# Altium PCB PCB_Pedal.pcbdoc
Units mil, origin at the board's own origin, x right, y up, seen from the top; angles counter-clockwise.
Board outline 4088 x 3698 mil, 2 copper layers (Top Layer, Bottom Layer); 43 components, 64 nets, 165 pads, 41 vias.
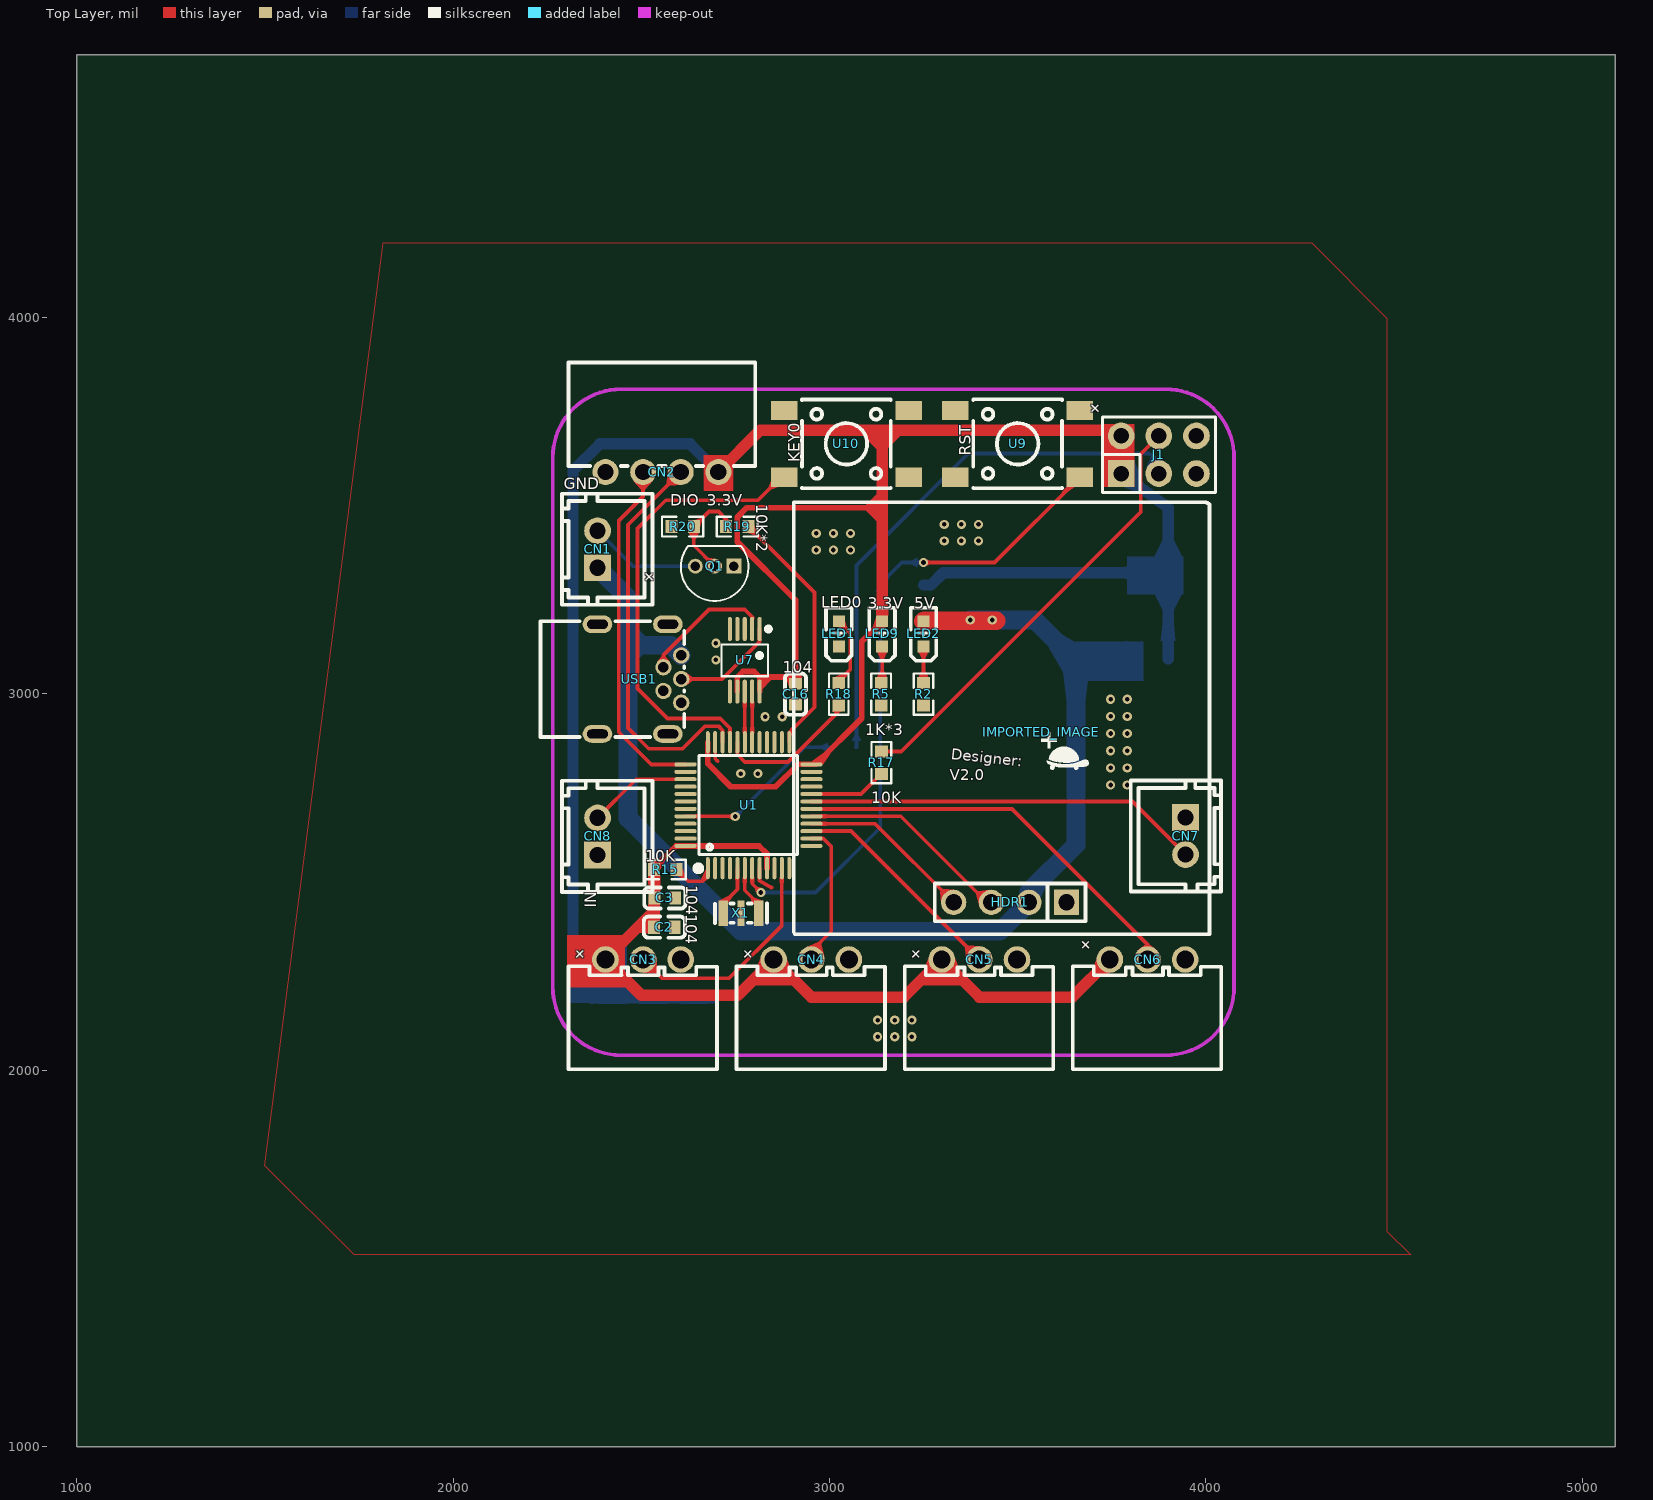
[diagram p0: Top Layer view]
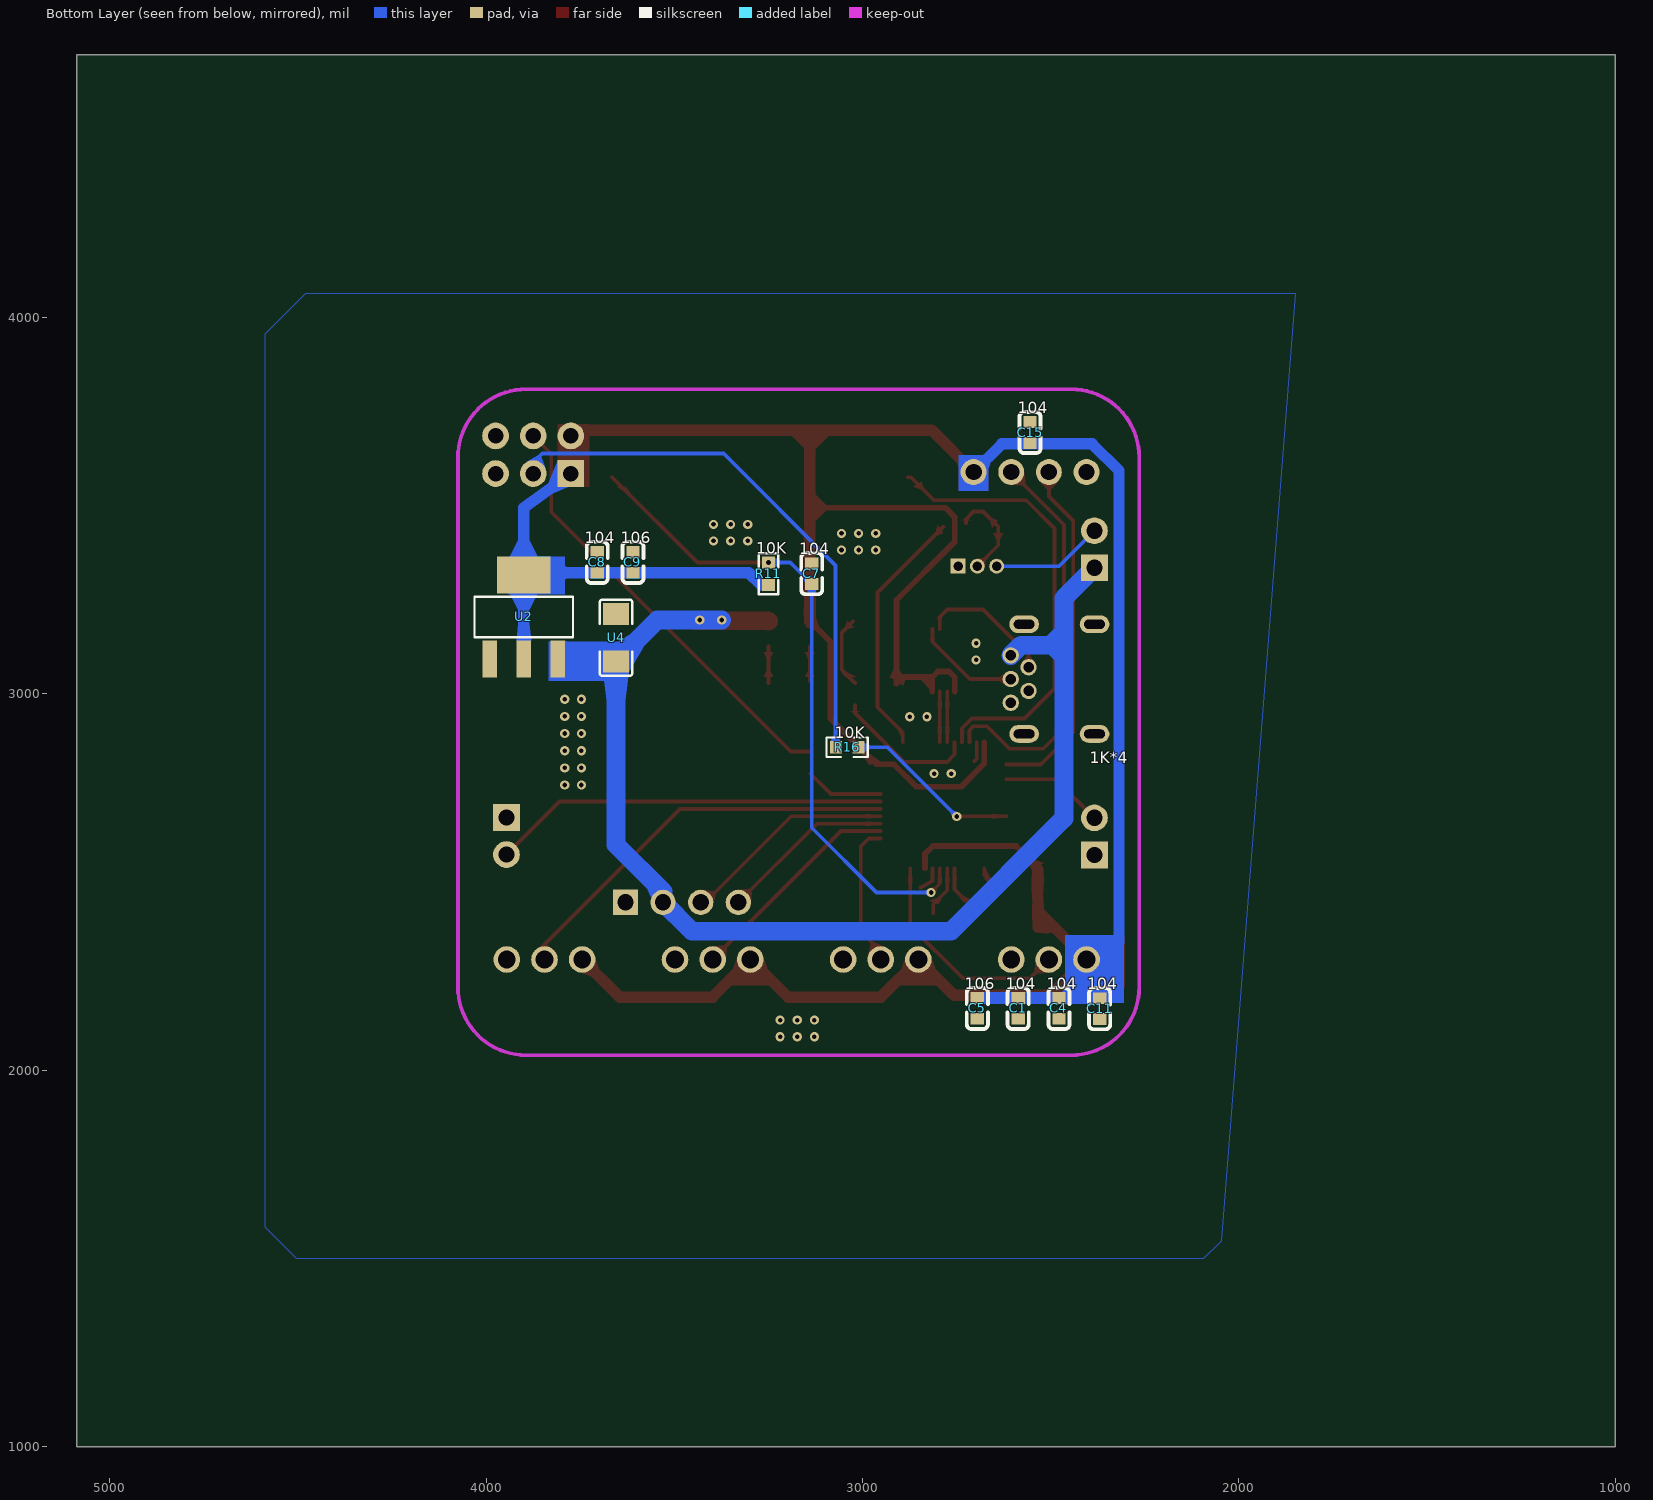
[diagram p1: Bottom Layer view, seen from below]

## Layer stack, top to bottom
Top Layer: signal copper (thickness not stored)
Dielectric: dielectric 12.6, FR-4, Dk 4.8
Bottom Layer: signal copper (thickness not stored)

## Board outline
5088,1000 1000,1000 1000,4698 5088,4698

## Components (designator, comment, footprint, x,y, rotation, side; value= is the part's Value field where it differs from the comment)
C1 "104" C0603#1 2586.7,2164 r270 bottom
C2 "104" C0603#2 2561.6,2380 r180 top
C3 "104" C0603#2 2562.9,2457.6 r180 top
C4 "104" C0603#1 2478.3,2164 r270 bottom
C5 "106" C0603#1 2695,2164 r270 bottom
C7 "104" C0603#1 3135,3319 r270 bottom
C8 "104" C0603#1 3705,3349 r90 bottom
C9 "106" C0603#1 3610,3349 r90 bottom
C11 "104" C0603#1 2370.2,2163.4 r90 bottom
C15 "104" C0603#1 2555,3694 r270 bottom
C16 "104" C0603#2 2910,2999 r90 top
CN1 "ZX-XH2.54-2PZZ" CONN-TH_2P-P2.50_HX25003-2A 2384,3384 r90 top
CN2 "XH-4AW_C2908613" CONN-TH_XH-4AW 2555,3589 r180 top
CN3 "XH-3AW_C2908612" CONN-TH_3P-P2.54_HCTL_XH-3AW 2505,2294 r180 top
CN4 "XH-3AW_C2908612" CONN-TH_3P-P2.54_HCTL_XH-3AW 2951.67,2294 r180 top
CN5 "XH-3AW_C2908612" CONN-TH_3P-P2.54_HCTL_XH-3AW 3398.33,2294 r180 top
CN6 "XH-3AW_C2908612" CONN-TH_3P-P2.54_HCTL_XH-3AW 3845,2294 r180 top
CN7 "ZX-XH2.54-2PZZ" CONN-TH_2P-P2.50_HX25003-2A 3946,2622 r270 top
CN8 "ZX-XH2.54-2PZZ" CONN-TH_2P-P2.50_HX25003-2A 2384,2621 r90 top
HDR1 "OLED" HDR-TH_4P-P2.54-V-M 3480,2445.89 r180 top
IMPORTED_IMAGE "IMPORTED_IMAGE" IMPORTED_IMAGE 3563.13,2897.73 r0 top
J1 "Header-Male-2.54_2x3" HDR-TH_6P-P2.54-V-M-R2-C3-S2.54-1 3875,3635 r0 top
LED1 "LED0603-R" LED0603-R-RD 3025,3159 r90 top
LED2 "LED0603-R" LED0603-R-RD 3250,3159.03 r90 top
LED9 "LED0603-R" LED0603-R-RD 3140,3159 r90 top
Q1 "2N3904_C2874602" TO-92-3_L4.6-W3.6-P1.30-L_2N3904 2695,3339 r180 top
R2 "1k" R0603#1 3250,2999.03 r270 top
R5 "1k" R0603#1 3137.39,2999.03 r270 top
R11 "10k" R0603#2 3250,3319 r270 bottom
R15 "10k" R0603#1 2564,2533 r180 top
R16 "10k" R0603#2 3041,2858 r180 bottom
R17 "10k" R0603#1 3138,2817 r270 top
R18 "1k" R0603#1 3024.77,2999.03 r90 top
R19 "10k" R0603#1 2755,3444 r180 top
R20 "10k" R0603#1 2610,3444 r0 top
U1 "STM32F103C8T6" LQFP-48_L7.0-W7.0-P0.50-LS9.0-BL 2785,2704 r0 top
U2 "AMS1117-3.3V" SOT-223-4_L6.5-W3.5-P2.30-LS7.0-BR 3900,3204 r90 bottom
U4 "47UF/10V" C1206 3655,3149 r270 bottom
U7 "CH340E" MSOP-10_L3.0-W3.0-P0.50-LS5.0-BL 2775,3089 r180 top
U9 "TPS645-5NC60" SW-SMD_4P-L6.0-W6.0-P4.50-LS9.2 3500,3664 r0 top
U10 "TPS645-5NC60" SW-SMD_4P-L6.0-W6.0-P4.50-LS9.2 3045,3664 r180 top
USB1 "UX-150-ARG4" MICRO-USB-TH_UX-150-ARG4 2495,3039 r270 top
X1 "8MHz" OSC-SMD_3P-L3.2-W1.3-P1.2-L 2765,2417 r0 top

## Footprints (in the part's own frame and the unit in brackets; to place one, negate y for a bottom-side part, rotate by r counter-clockwise, add the part's x,y. Pads: shape width x height; smd on the part's side, far side on the other; paste and mask are expansions set on the pad)
C0603#1 [mm]
  rect 0.8x0.9 smd paste+0 mask+0.051: 1(0.7,0) 2(-0.7,0)
  silkscreen extent -1.39,-0.71 1.39,0.71
C0603#2 [mm]
  rect 0.8x0.9 smd paste+0 mask+0.051: 1(-0.7,0) 2(0.7,0)
  silkscreen extent -1.39,-0.71 1.39,0.71
C1206 [mm]
  rect 1.485x1.728 smd paste-100 mask+0.051: 1(1.593,0) 2(-1.593,0)
  silkscreen extent -2.56,-1.09 2.56,1.09
CONN-TH_2P-P2.50_HX25003-2A [mm]
  rect 1.8x1.8 hole 1.1 paste+0 mask+0.05: 1(-1.25,0)
  round 1.8 hole 1.1 paste+0 mask+0.05: 2(1.25,0)
  silkscreen extent -3.75,-3.7 3.75,2.41
CONN-TH_3P-P2.54_HCTL_XH-3AW [mm]
  round 1.8 hole 1.199 paste+0 mask+0.051: 1(-2.54,0) 2(0.001,0) 3(2.54,0)
  silkscreen extent -4.98,0.46 5.04,7.4
CONN-TH_XH-4AW [mm]
  round 1.75 hole 1.1 paste+0 mask+0.05: 1(-3.81,0) 2(-1.27,0) 3(1.27,0) 4(3.81,0)
  silkscreen extent -6.3,-7.4 6.3,-0.4
HDR-TH_4P-P2.54-V-M [mm]
  rect 1.7x1.7 hole 1.1 paste+0 mask+0.051: 1(-3.81,0)
  round 1.7 hole 1.1 paste+0 mask+0.051: 2(-1.27,0) 3(1.27,0) 4(3.81,0)
  silkscreen extent -5.08,-1.27 5.08,1.27
HDR-TH_6P-P2.54-V-M-R2-C3-S2.54-1 [mm]
  rect 1.8x1.8 hole 1.05 paste+0 mask+0.051: 1(-2.54,-1.27)
  round 1.8 hole 1.05 paste+0 mask+0.051: 2(-2.54,1.27) 3(0,-1.27) 4(0,1.27) 5(2.54,-1.27) 6(2.54,1.27)
  silkscreen extent -3.81,-2.54 3.81,2.54
IMPORTED_IMAGE [mil]
  silkscreen extent 0,-100 126,0
LED0603-R-RD [mm]
  rect 0.8x0.8 smd paste+0 mask+0.051: 1(0.851,0) 2(-0.851,0)
  silkscreen extent -1.82,-0.86 1.77,0.86
LQFP-48_L7.0-W7.0-P0.50-LS9.0-BL [mm]
  oval 0.27x1.5 smd paste+0 mask+0.05: 1(-2.75,-4.25) 2(-2.25,-4.25) 3(-1.75,-4.25) 4(-1.25,-4.25) 5(-0.75,-4.25) 6(-0.25,-4.25) 7(0.25,-4.25) 8(0.75,-4.25) 9(1.25,-4.25) 10(1.75,-4.25) 11(2.25,-4.25) 12(2.75,-4.25) 25(2.75,4.25) 26(2.25,4.25) 27(1.75,4.25) 28(1.25,4.25) 29(0.75,4.25) 30(0.25,4.25) 31(-0.25,4.25) 32(-0.75,4.25) 33(-1.25,4.25) 34(-1.75,4.25) 35(-2.25,4.25) 36(-2.75,4.25)
  oval 1.5x0.27 smd paste+0 mask+0.05: 13(4.25,-2.75) 14(4.25,-2.25) 15(4.25,-1.75) 16(4.25,-1.25) 17(4.25,-0.75) 18(4.25,-0.25) 19(4.25,0.25) 20(4.25,0.75) 21(4.25,1.25) 22(4.25,1.75) 23(4.25,2.25) 24(4.25,2.75) 37(-4.25,2.75) 38(-4.25,2.25) 39(-4.25,1.75) 40(-4.25,1.25) 41(-4.25,0.75) 42(-4.25,0.25) 43(-4.25,-0.25) 44(-4.25,-0.75) 45(-4.25,-1.25) 46(-4.25,-1.75) 47(-4.25,-2.25) 48(-4.25,-2.75)
  silkscreen extent -3.59,-4.46 3.3,3.34
MICRO-USB-TH_UX-150-ARG4 [mm]
  round 1.1 hole 0.7 paste+0 mask+0.051: 1(-1.6,2.825) 2(-0.8,1.625) 3(0,2.825) 4(0.8,1.625) 5(1.6,2.825)
  oval 1.2x2 hole 0.6 slot 1.4 at 90 deg paste+0 mask+0.051: 6(-3.7,1.925) 6(-3.7,-2.825) 6(3.7,1.925) 6(3.7,-2.825)
  silkscreen extent -3.9,-6.67 3.9,3.03
MSOP-10_L3.0-W3.0-P0.50-LS5.0-BL [mm]
  oval 0.28x1.62 smd paste+0 mask+0.051: 1(-1,-2.11) 2(-0.5,-2.11) 3(0,-2.11) 4(0.5,-2.11) 5(1,-2.11) 6(1,2.11) 7(0.5,2.11) 8(0,2.11) 9(-0.5,2.11) 10(-1,2.11)
  silkscreen extent -1.74,-2.26 1.58,1.07
OSC-SMD_3P-L3.2-W1.3-P1.2-L [mm]
  rect 0.65x1.7 smd paste+0 mask+0.051: 1(-1.2,0) 3(1.2,0)
  rect 0.5x1.7 smd paste+0 mask+0.051: 2(0,0)
  silkscreen extent -1.75,-0.66 1.75,0.66
R0603#1 [mil]
  rect 31.75x34.02 smd paste-3937.01 mask+2: 1(-29.66,0) 2(29.65,0)
  silkscreen extent -55,-26 55,26
R0603#2 [mil]
  rect 31.75x34.02 smd paste-3937.01 mask+2: 1(29.66,0) 2(-29.66,0)
  silkscreen extent -55,-26 55,26
SOT-223-4_L6.5-W3.5-P2.30-LS7.0-BR [mm]
  rect 2.47x0.98 smd paste+0 mask+0.051: 1(-2.835,2.3) 2(-2.835,0) 3(-2.835,-2.3)
  rect 2.47x3.6 smd paste+0 mask+0.051: 4(2.835,0)
  silkscreen extent -1.37,-3.33 1.37,3.33
SW-SMD_4P-L6.0-W6.0-P4.50-LS9.2 [mm]
  rect 1.8x1.3 smd paste+0 mask+0.051: 1(-4.2,2.25) 2(4.2,2.25) 3(-4.2,-2.25) 4(4.2,-2.25)
  silkscreen extent -3,-3 3,3
TO-92-3_L4.6-W3.6-P1.30-L_2N3904 [mm]
  rect 1x1 hole 0.65 paste+0 mask+0.05: 1(-1.3,0)
  round 1 hole 0.65 paste+0 mask+0.05: 2(0,0) 3(1.3,0)
  silkscreen extent -2.28,-1.35 2.28,2.34

## Via types
v1: diameter 24.41, hole 12.2, Top Layer to Bottom Layer, tented both sides, 41 vias

## Nets (pads, with @x,y where several pads share a name; then routed paths per layer and width w, separated by ;. In a path a pad name is that pad's centre, name@x,y a point inside that pad or via, vN(x,y) a via of type N, cw(c..) or ccw(c..) an arc to the next point about the centre after c; other vN are vias at no path point)
ADC1_IN1: CN3.2 U1.11 | length 599.6
  Top Layer w10: CN3.2 2555,2244 2733,2244 2873.6,2384.6 U1.11
ADC2_IN4: CN4.2 U1.14 | length 383.7
  Top Layer w10: CN4.2 2951.6,2315.6 3005,2369 3005,2594 2983.6,2615.4 U1.14
ADC3_IN5: CN5.2 U1.15 | length 587.3
  Top Layer w10: U1.15 3057.2,2635.1 CN5.2
ADC4_IN8: CN6.2 U1.18 | length 1081.9
  Top Layer w10: U1.18 3484.8,2694.2 3845,2334 CN6.2
BOOT0: R16.1 U1.44 | length 469.8
  Top Layer w10: U1.44 v1(2750,2674)
  Bottom Layer w10: v1(2750,2674) 2934,2858 R16.1
BOOT1: R17.2 U1.20 | length 208
  Top Layer w10: U1.20 3084.19,2733.53 R17.2
CH340_D+: U7.1 USB1.3 | length 283.1
  Top Layer w10: USB1.3 2715,3039 2814.4,3138.4 U7.1
CH340_D-: U7.2 USB1.2 | length 358.7
  Top Layer w10: USB1.2 2559,3103 2680,3224 2775,3224 2794.7,3204.3 U7.2
CN1_2: CN1.2 Q1.3 | length 298.8
  Bottom Layer w10: CN1.2 2478.21,3339 Q1.3
GND: C1.1 C2.1 C3.1 C4.1 C5.1 C7.2 C8.1 C9.1 C11.2 C15.2 C16.1 CN2.4 CN3.1 CN4.1 CN5.1 CN6.1 CN7.1 CN8.1 HDR1.1 J1.5 J1.6 LED1.2 Q1.1 R2.2 R5.2 R20.1 U1.8 U1.23 U1.35 U1.47 U2.1 U4.2 U7.3 U9.2 U10.4 USB1.5 X1.2 | length 123.4
  Top Layer w10: U1.35 2696.4,2827.6 2703,2821 ; U1.8 2814,2503 2846,2485
  other v1: 3128,2089 3173.5,2089 3219,2089 3128,2133 3173.5,2133 3219,2133 3747,2757.5 3791,2757.5 2764.5,2788 2810,2788 3747,2803 3791,2803 3747,2848.5 3791,2848.5 3747,2894.5 3791,2894.5 2829,2939 2874.5,2939 3747,2940 3791,2940 3747,2985.5 3791,2985.5 2698.5,3090 2698.5,3134 2965,3382 3010.5,3382 3056,3382 3305,3406 3350.5,3406 3396,3406 2965,3426 3010.5,3426 3056,3426 3305,3450 3350.5,3450 3396,3450
KEY1: U1.33 U10.2 | length 1197.6
  Top Layer w10: U1.33 2735.8,2908.2 2710,2934 2570,2934 2490,3014 2490,3439 2565,3514 2810,3514 2871.4,3575.4 U10.2@2879.6,3575.4
LED0: R18.1 U1.32 | length 379.3
  Top Layer w10: U1.32 2755.5,2839.5 2775,2819 2890,2819 3020,2949 R18.1@3020,2969.4
LED1_1: LED1.1 R18.2 | length 190.7
  Top Layer w10: R18.2@3020,3028.7 3055,3063.7 3055,3162.5 LED1.1
LED2_2: LED2.2 R2.1 | length 96.8
  Top Layer w10: R2.1 LED2.2
NPN: R19.1 U1.25 | length 672.9
  Top Layer w10: R19.1 2960,3268.7 2960,2964 2893.3,2897.3 U1.25
NRST: C7.1 R11.2 U1.7 U9.4 | length 1758
  Top Layer w10: U1.7 2794.8,2495.2 v1(2818,2472) ; v1(3250,3348.66) 3438.6,3348.7 U9.4@3665.4,3575.4
  Bottom Layer w10: v1(2818,2472) 2963,2472 3135,2644 C7.1 3192.2,3348.7 v1(3250,3348.66)
OSC_IN: U1.5 X1.1 | length 135.3
  Top Layer w10: X1.1 2717.8,2442.8 2755.5,2480.5 U1.5
OSC_OUT: U1.6 X1.3 | length 135
  Top Layer w10: U1.6 2775.2,2477.8 2812.2,2440.8 X1.3
PA6_OLED_SDA: HDR1.4 U1.16 | length 464.2
  Top Layer w10: U1.16 3121.1,2654.8 HDR1.4
PA7_OLED_SCL: HDR1.3 U1.17 | length 572.4
  Top Layer w10: U1.17 3189.5,2674.5 3418.1,2445.9 HDR1.3
PEDAL_KEY1: CN7.2 U1.19 | length 1052.1
  Top Layer w10: U1.19 3804.95,2713.84 CN7.2
PEDAL_KEY2: CN8.2 U1.39 | length 276.2
  Top Layer w10: CN8.2 2486.69,2772.9 U1.39
R5_1: LED9.2 R5.1 | length 98.9
  Top Layer w10: R5.1@3135,3028.7 3140,3033.7 LED9.2
R15_1: R15.1 U1.1 | length 121.3
  Top Layer w10: R15.1 2625,2502 2661,2502 2676.7,2517.7 U1.1
R16_2: J1.3 R16.2 | length 1447.6
  Bottom Layer w10: R16.2 3072,2858 3072,3341 3369,3638 3851,3638 3870,3619 J1.3
R17_1: J1.4 R17.1 | length 1174.5
  Top Layer w10: R17.1 3190.66,2846.66 3827,3483 3827,3637 J1.4
R20_2: Q1.2 R19.2 R20.2 | length 248.2
  Top Layer w10: Q1.2 2639.7,3394.3 R20.2 2679.7,3484 2705,3484 2725.3,3463.7 R19.2@2725.3,3454
S$7011: 
S$7018: 
S$7038: 
S$7042: 
SWDCLK: CN2.3 U1.37 | length 930.5
  Top Layer w10: CN2.3 2505,3524 2440,3459 2440,2899 2526.7,2812.3 U1.37
SWDIO: CN2.2 U1.34 | length 1072.9
  Top Layer w10: CN2.2 2465,3449 2465,2909 2520,2854 2610,2854 2670,2914 2705,2914 2716.1,2902.9 U1.34
U1_2: U1.2
U1_3: U1.3
U1_4: U1.4
U1_10: U1.10
U1_12: U1.12
U1_13: U1.13
U1_21: U1.21
U1_22: U1.22
U1_26: U1.26
U1_27: U1.27
U1_28: U1.28
U1_29: U1.29
U1_38: U1.38
U1_40: U1.40
U1_41: U1.41
U1_42: U1.42
U1_43: U1.43
U1_45: U1.45
U1_46: U1.46
U7_4: U7.4
U7_5: U7.5
U7_6: U7.6
U9_1: U9.1
U9_3: U9.3
U10_1: U10.1
U10_3: U10.3
USART1_RX: U1.31 U7.8 | length 134.7
  Top Layer w10: U7.8 2775,2914 2775.2,2913.8 U1.31
USART1_TX: U1.30 U7.9 | length 134.6
  Top Layer w10: U7.9 2794.7,2919.3 2794.8,2919.2 U1.30
USB1_4: USB1.4
VCC3.3V: C1.2 C2.2 C3.2 C4.2 C5.2 C8.2 C9.2 C11.1 C15.1 C16.2 CN2.1 CN3.3 CN4.3 CN5.3 CN6.3 J1.1 J1.2 LED9.1 R11.1 R15.2 U1.9 U1.24 U1.36 U1.48 U2.2 U2.4 U7.7 U7.10 | length 9313.3
  Top Layer w15: R15.2@2535.3,2539 2592.1,2595.7 U1.48 2813.3,2595.7 2834.2,2574.8 U1.9 ; U1.36 2676.7,2814.3 2738,2753 2857,2753 2916.3,2812.3 U1.24 2963.3,2812.3 3086,2935 3086,3138.5 LED9.1 ; U7.7 2755.3,3044.3 2770,3059 2800,3059 2814.4,3044.6 ; U7.10 2814.4,3044.6 ; 3140,3495.6 3138.4,3494 2780,3494 2755,3469 2755,3404 2910,3249 C16.2 2892,3044.6 2814.4,3044.6
  Top Layer w30: R15.2 C3.2 2534,2456.2 C2.2 2491,2380 CN3.3 2500,2199 2756.7,2199 CN4.3 2951.7,2194 3198.3,2194 CN5.3 ; CN2.1 2816,3700 3751,3700 3775,3676 J1.1 ; 3137.5,3664 3140,3661.5 LED9.1 ; CN5.3 3398.33,2194 3645,2194 CN6.3
  Bottom Layer w30: C11.1 C4.2 C1.2 C5.2 ; CN3.3 2365,2294 2319,2340 2319,3593 2390,3664 2630,3664 CN2.1 ; R11.1@3250,3289 3270,3289 3302.4,3321.4 C9.2 C8.2 3894.2,3321.4 U2.4 ; J1.1 3900,3494 U2.4 ; U2.2 U2.4
VCC5V: CN1.1 HDR1.2 LED2.1 U2.3 U4.1 USB1.1 | length 3442.5
  Top Layer w50: LED2.1 3251.5,3194 v1@3443,3194
  Bottom Layer w50: CN1.1 2465,3253.79 2465,3164 2500,3129 ; USB1.1 2579.2,3129 2500,3129 ; v1(3374,3196) v1(3432.74,3196) ; v1(3432.74,3196) 3545.3,3196 U4.1 ; U2.3 3809.4,3086.3 U4.1 ; 2500,3129 2495,3129 2465,3099 2465,2669 2765,2369 3453.1,2369 HDR1.2 3530,2474 3655,2599 U4.1
pads on no net: USB1.6

## Polygon pours and split planes (outlines as drawn)
GND on Bottom Layer (solid): 1849,4063 4480,4063 4588,3955 4588,1584 4504,1500 2093,1500 2046,1547
GND on Top Layer (solid): 1815,4198 4281,4198 4481,3998 4481,1572 4544,1509 1737,1509 1500,1746

## Keep-outs
Keep-Out Layer:
  lines w10: 2265,2220.8 ccw(c2446,2220.8) 2446,2039.8 ; 2265,3628 cw(c2446,3628) 2446,3809 ; 3894,2039.8 ccw(c3894,2220.8) 4075,2220.8 ; 3894,3809 cw(c3894,3628) 4075,3628

## Other copper
Top Layer:
  region net VCC3.3V: 2920.82,2224.85 2920.02,2225.65 2783.35,2225.65 2851.67,2294 2920.02,2225.65 2920.82,2224.85
  region net VCC3.3V: 3367.48,2224.85 3366.68,2225.65 3230.02,2225.65 3298.33,2294 3366.68,2225.65 3367.48,2224.85
  region net VCC3.3V: 3139,3636.5 3074,3701.5 3204,3701.5 3139,3636.5
  region net VCC3.3V: 3140,3444 3090,3494 3140,3544 3140,3444
  region net VCC3.3V: 2814.37,3005.93 2850,3041.56 2850,3044.6 2814.4,3044.6
  region net VCC3.3V: 2535.76,2383.05 2474.44,2383.84 2535.76,2445.15 2535.76,2383.05
  region net VCC3.3V: 2702.84,3623.38 2739.38,3586.84 2748.77,3611.56 2727.56,3632.77
  region net SWDIO: 2570.62,3591.16 2607.16,3554.62 2575.37,3552.3 2568.3,3559.37
  region net SWDCLK: 2530.84,3566.21 2479.16,3566.21 2500,3542.1 2510,3542.1
  region net ADC1_IN1: 2502.76,2258.64 2540.31,2296.24 2542.62,2263.45 2535.55,2256.38
  region net VCC3.3V: 2402.78,2329.36 2440.36,2291.78 2449.72,2317.5 2428.5,2338.72
  region net VCC3.3V: 2402.78,2258.64 2440.36,2296.22 2449.72,2270.5 2428.5,2249.28
  region net ADC2_IN4: 2985.86,2303.1 2938.31,2326.84 2968.44,2339.52 2977.88,2334.81
  region net VCC3.3V: 2816.3,2296.2 2853.9,2258.64 2828.18,2249.27 2806.96,2270.47
  region net VCC3.3V: 2849.45,2258.64 2887.03,2296.22 2896.38,2270.5 2875.17,2249.28
  region net ADC3_IN5: 3362.92,2291.78 3400.5,2329.36 3367.71,2331.65 3360.63,2324.57
  region net VCC3.3V: 3296.12,2258.64 3333.7,2296.22 3343.05,2270.5 3321.84,2249.28
  region net VCC3.3V: 3262.97,2296.22 3300.55,2258.64 3274.83,2249.28 3253.62,2270.5
  region net ADC4_IN8: 3871.53,2317.44 3818.38,2317.44 3839.95,2334.05 3849.95,2334.05
  region net VCC3.3V: 3709.64,2296.22 3747.22,2258.64 3721.5,2249.28 3700.28,2270.5
  region net PA7_OLED_SCL: 3425.89,2479.11 3397.56,2437.67 3389.52,2467.41 3395.26,2475.81
  region net PA6_OLED_SDA: 3296.6,2443.8 3332.1,2479.29 3301.32,2481.65 3294.25,2474.57
  region net VCC3.3V: 3760.99,3717.55 3744.46,3667.03 3724.24,3685 3734.06,3715
  region net VCC3.3V: 3801.57,3661.56 3748.43,3661.56 3760,3636.76 3790,3636.76
  region net R20_2: 2675.35,3337.77 2696.23,3358.65 2679.58,3361.49 2672.51,3354.41
  region net CH340_D-: 2575.23,3084.81 2542.75,3084.83 2554,3099.98 2564,3099.98
  region net CH340_D+: 2620.54,3022.76 2620.54,3055.24 2635.7,3044 2635.7,3034
  region net BOOT0: 2741.96,2683.18 2741.89,2664.88 2733.36,2669.06 2733.4,2679.06
  region net NRST: 2818.76,2484.18 2805.82,2471.24 2802.71,2480.22 2809.78,2487.29
  region net NRST: 3258.07,3339.51 3258.07,3357.81 3266.62,3353.66 3266.62,3343.66
  region net VCC3.3V: 2550.2,2516 2518.5,2516 2520.16,2471 2550.16,2471
  region net VCC3.3V: 2518.5,2550 2550.2,2534.15 2560.9,2553.96 2546.76,2561.03
  region net R15_1: 2609.5,2536.58 2595.31,2516 2609.56,2510.24 2615.33,2518.6
  region net VCC3.3V: 2518.26,2362.3 2518.26,2397.7 2491,2395 2491,2365
  region net VCC3.3V: 2518.26,2397.7 2549.76,2397.7 2549,2442.7 2519,2442.7
  region net VCC3.3V: 2519.6,2475.26 2551.1,2475.26 2549.51,2520.26 2519.51,2520.26
  region net VCC3.3V: 2892.29,3021.07 2923.19,3042.31 2898.24,3048.92 2886.66,3039.3
  region net VCC3.3V: 2892.29,3042.31 2927.71,3042.31 2917.5,3064.81 2902.5,3064.81
  region net VCC3.3V: 3739.6,3620.4 3810.4,3620.4 3790,3665.4 3760,3665.4
  region net LED1_1: 3040.75,3194.44 3023.08,3176.75 3038.98,3171.45 3046.05,3178.52
  region net LED2_2: 3262.5,3109.78 3237.5,3109.78 3245,3094.78 3255,3094.78
  region net VCC3.3V: 3124.25,3208.25 3155.75,3208.25 3155,3253.25 3125,3253.25
  region net VCC3.3V: 3150.76,3176.75 3124.25,3203.27 3116.3,3179.41 3126.9,3168.8
  region net R5_1: 3152.5,3109.75 3127.5,3109.75 3135,3094.75 3145,3094.75
  region net LED2_2: 3262.5,3044.56 3237.5,3044.56 3245,3059.56 3255,3059.56
  region net R5_1: 3152.5,3044.56 3127.5,3044.56 3135,3059.56 3145,3059.56
  region net LED1_1: 3016.88,3044.56 3041.78,3042.34 3054.63,3056.25 3041.65,3057.41
  region net LED0: 3007.76,2953.5 3032.5,2953.5 3025,2949 3015,2949
  region net R20_2: 2712.84,3461.01 2737.84,3461.01 2730.34,3463.66 2720.34,3463.66
  region net NPN: 2800.53,3447.24 2785.87,3426.99 2800.28,3421.31 2806.22,3429.51
  region net R20_2: 2652.16,3426.99 2627.16,3426.99 2634.66,3411.99 2644.66,3411.99
  region net R20_2: 2640.87,3461.01 2655.53,3440.76 2661.22,3458.49 2655.28,3466.69
  region net NRST: 3652.26,3549.83 3629.92,3549.83 3617.69,3534.83 3631.83,3534.83
  region net KEY1: 2865.38,3549.83 2844.21,3563.13 2838.15,3549.22 2846.84,3543.76
  region net OSC_IN: 2705.92,2450.5 2730.6,2446.51 2741.94,2459.87 2729.77,2461.84
  region net OSC_OUT: 2799.4,2441.41 2822.69,2450.5 2801.67,2458.4 2791.5,2454.43
  region net R15_1: 2675.69,2507.26 2671.41,2531.89 2660.1,2508.17 2664.54,2498.47
  region net OSC_IN: 2760.78,2512.47 2750.15,2512.47 2750.47,2497.47 2760.47,2497.47
  region net OSC_OUT: 2780.48,2512.48 2769.85,2512.45 2770.2,2497.45 2780.2,2497.48
  region net NRST: 2800.15,2512.45 2789.52,2512.48 2789.8,2497.48 2799.8,2497.45
  region net ADC1_IN1: 2878.89,2512.47 2868.26,2512.46 2868.6,2497.46 2878.6,2497.47
  region net ADC2_IN4: 2976.53,2610.11 2976.53,2620.74 2983.58,2620.42 2983.58,2610.42
  region net ADC3_IN5: 2976.53,2629.79 2976.53,2640.42 2991.53,2640.1 2991.53,2630.1
  region net PA6_OLED_SDA: 2976.53,2649.48 2976.53,2660.11 2991.53,2659.79 2991.53,2649.79
  region net PA7_OLED_SCL: 2976.53,2669.16 2976.53,2679.79 2991.53,2679.47 2991.53,2669.47
  region net ADC4_IN8: 2976.53,2688.85 2976.53,2699.48 2991.53,2699.16 2991.53,2689.16
  region net VCC3.3V: 2949.83,2817.58 2981.75,2811.23 3001.69,2840.08 2980.48,2840.08
  region net NPN: 2890.23,2899.89 2898.59,2887.9 2905.81,2902.74 2899.43,2910.51
  region net USART1_TX: 2800.15,2895.53 2789.52,2895.53 2789.84,2910.53 2799.84,2910.53
  region net USART1_RX: 2780.48,2895.53 2769.85,2895.53 2770.16,2910.53 2780.16,2910.53
  region net LED0: 2760.78,2847.13 2750.15,2847.09 2750.5,2839.48 2760.5,2839.52
  region net KEY1: 2741.11,2895.53 2730.48,2895.53 2730.79,2908.21 2740.79,2908.21
  region net SWDIO: 2721.41,2895.53 2710.78,2895.53 2711.1,2902.9 2721.1,2902.9
  region net SWDCLK: 2593.48,2817.58 2593.46,2806.95 2578.46,2807.3 2578.48,2817.3
  region net BOOT0: 2641.94,2679.79 2641.85,2669.16 2656.85,2669.35 2656.93,2679.35
  region net CH340_D+: 2819.88,3145.71 2808.86,3145.67 2809.4,3138.38 2819.4,3138.42
  region net CH340_D-: 2800.19,3198.43 2789.17,3198.47 2789.7,3204.32 2799.7,3204.28
  region net USART1_TX: 2800.19,2979.55 2789.17,2979.55 2789.68,2964.55 2799.68,2964.55
  region net USART1_RX: 2780.51,2979.55 2769.49,2979.55 2770,2964.55 2780,2964.55
  rectangle net VCC3.3V: 2302.5,2219 2457.5,2359
  rectangle net VCC3.3V: 2665,3539 2745,3634
  rectangle net VCC3.3V: 3726,3549 3811,3716
Bottom Layer:
  region net VCC5V: 2440,3079 2440,3174 2485,3129 2495,3129
  region net VCC3.3V: 2450.94,2229.92 2444.06,2223.03 2444.06,2178.08 2495.94,2178.08
  region net VCC3.3V: 2670.62,3586.84 2707.16,3623.38 2682.44,3632.77 2661.23,3611.56
  region net VCC3.3V: 2381.56,2267.43 2381.56,2320.57 2365,2309 2365,2279
  region net VCC5V: 3560.97,2458.58 3513.55,2475.03 3518.69,2498.04 3571.18,2479.83
  region net VCC5V: 3496.6,2447.99 3532.09,2412.5 3515.46,2396 3480.11,2431.36
  region net R16_2: 3892.04,3616.07 3842.05,3598.02 3853.43,3628.5 3863.82,3632.25
  region net BOOT0: 2762.18,2673.24 2749.24,2686.18 2758.21,2689.29 2765.29,2682.21
  region net NRST: 2826.07,2462.85 2826.07,2481.15 2834.61,2477 2834.61,2467
  region net NRST: 3241.93,3339.51 3241.93,3357.81 3233.38,3353.66 3233.38,3343.66
  region net VCC3.3V: 3722.71,3305.69 3722.71,3337.19 3767.71,3336.44 3767.71,3306.44
  region net VCC3.3V: 3687.29,3337.19 3687.29,3305.69 3642.29,3306.44 3642.29,3336.44
  region net VCC3.3V: 3592.29,3337.19 3592.29,3305.69 3547.29,3306.4 3547.29,3336.4
  region net VCC3.3V: 3627.71,3305.69 3627.71,3337.19 3672.71,3336.44 3672.71,3306.44
  region net VCC3.3V: 3880.71,3141.01 3919.29,3141.01 3915,3186.01 3885,3186.01
  region net VCC5V: 3790.16,3043.76 3790.16,3141.01 3715.16,3111.3 3715.16,3061.3
  region net VCC3.3V: 3937.5,3364.24 3862.5,3364.24 3885,3409.24 3915,3409.24
  region net VCC3.3V: 3862.5,3266.99 3937.5,3266.99 3915,3221.99 3885,3221.99
  region net VCC3.3V: 3829.14,3358.94 3829.14,3283.94 3784.14,3306.44 3784.14,3336.44
  region net VCC5V: 3620.99,3057.07 3689.01,3115.54 3620.83,3155.83 3582.8,3123.14
  region net VCC5V: 3689.01,3057.07 3620.99,3057.07 3630,2982.07 3680,2982.07
  region net VCC5V: 3689.01,3115.54 3689.01,3057.07 3764.01,3061.3 3764.01,3111.3
  region net R16_2: 3084.5,2875 3059.5,2875 3067,2890 3077,2890
  region net BOOT0: 2995.5,2845.5 2995.5,2870.5 2980.5,2863 2980.5,2853
  region net NRST: 3130.95,3307.19 3152.71,3294.89 3159.13,3308.5 3150.09,3313.6
  region net NRST: 3122.5,3275.69 3147.5,3275.69 3140,3260.69 3130,3260.69
  region net VCC3.3V: 2677.31,2207.29 2677.31,2175.79 2632.31,2176.56 2632.31,2206.56
  region net VCC3.3V: 2496.01,2175.79 2496.01,2207.29 2541.01,2206.56 2541.01,2176.56
  region net VCC3.3V: 2460.61,2207.29 2460.61,2175.79 2415.61,2176.21 2415.61,2206.21
  region net VCC3.3V: 2604.41,2175.79 2604.41,2207.29 2649.41,2206.56 2649.41,2176.56
  region net VCC3.3V: 2568.91,2207.29 2568.91,2175.79 2523.91,2176.56 2523.91,2206.56
  region net VCC3.3V: 2387.91,2175.19 2387.91,2206.69 2432.91,2206.3 2432.91,2176.3
  region net NRST: 3232.99,3361.16 3232.99,3336.16 3217.99,3343.66 3217.99,3353.66
  region net VCC3.3V: 3267.01,3305.22 3267.01,3273.47 3270,3274 3270,3304
  region net VCC3.3V: 3810.4,3618.37 3780.48,3549.6 3822,3532.23 3834.26,3560.41
  rectangle net VCC3.3V: 3790,3264 3940,3364
  rectangle net VCC5V: 3625,3034 3835,3139
  rectangle net VCC3.3V: 2305,2179 2462.5,2359
  rectangle net VCC3.3V: 2665,3539 2745,3634

## Silkscreen, mask and mechanical layers (free items; w line width, h text height)
Top Overlay:
  lines w10 net S$7011: 2907.64,2360.89 4010,2360.89
  lines w10 net S$7018: 4010,2360.89 4010,3502.62
  lines w10 net S$7038: 2905,2367.27 2905,3509
  lines w10 net S$7042: 2905,3509 3994.61,3509 cw(c3994.61,3487.23) 4010,3502.62
  text "+" at 3728.07,3754.72 h30 r135
  text "RST" at 3375.71,3631.75 h30 r90
  text "KEY0" at 2920.66,3615 h30 r90
  text "GND" at 2294,3543 h30
  text "10K*2" at 2805.32,3503.92 h30 r270
  text "3.3V" at 2673.99,3499.94 h30
  text "DIO" at 2577.66,3499 h30
  text "+" at 2542.07,3306.72 h30 r135
  text "LED0" at 2978.67,3228.44 h30
  text "3.3V" at 3101.67,3226.44 h30
  text "5V" at 3225.67,3225.97 h30
  text "104" at 2876,3055.44 h30
  text "1K*3" at 3095,2890 h30
  text "Designer:" at 3320.98,2816 h50 r354
  text "V2.0" at 3319,2759.21 h50
  text "10K" at 3111,2709 h30
  text "10K" at 2510.42,2554 h30
  text "104" at 2619.34,2491.58 h30 r270
  text "IN" at 2381,2432 h30 r90
  text "104" at 2618,2414 h30 r270
  text "+" at 2340.39,2328.61 h30 r225
  text "+" at 2787.06,2328.61 h30 r225
  text "+" at 3233.72,2328.61 h30 r225
  text "+" at 3701.61,2328.61 h30 r135
Bottom Overlay:
  text "104" at 2587.88,3745 h30
  text "106" at 3642.88,3400 h30
  text "104" at 3737.88,3400 h30
  text "10K" at 3282.88,3372.1 h30
  text "104" at 3167.88,3370 h30
  text "10K" at 3073.88,2881.44 h30
  text "1K*4" at 2396,2815 h30
  text "104" at 2511.21,2215 h30
  text "104" at 2619.55,2215 h30
  text "106" at 2727.88,2215 h30
  text "104" at 2403.09,2214.39 h30